# EAGLE board Opto_v2 (EAGLE 8.6.3)
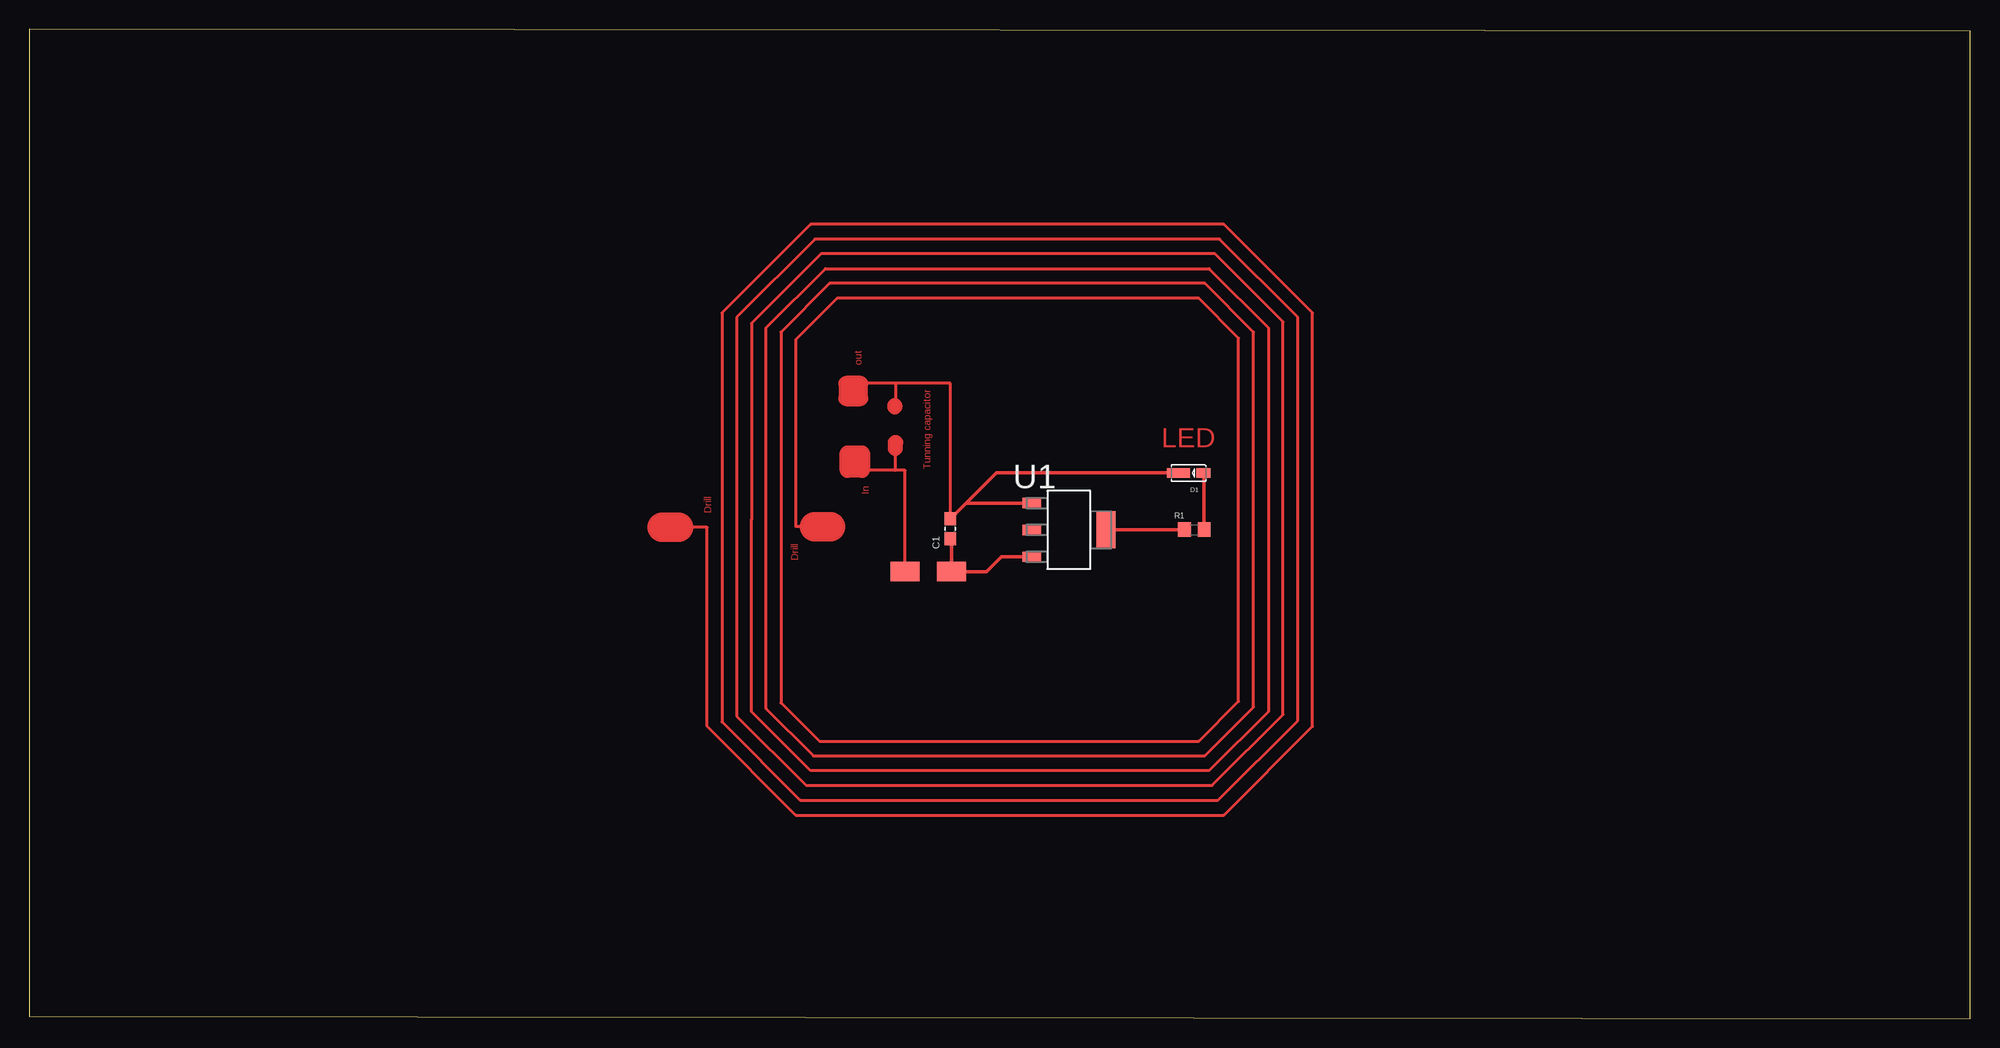
[diagram p0: board, top side]

Size 167.01 x 85.1 mm. Coordinates in mm from the lower left corner, seen from the top.
Outline: 0,0.2 167.01,0 167.01,84.9 0,85.1 0,0.2
Copper layers (1*16): Top 0.035mm / dielectric 1.5mm / Bottom 0.035mm
Design rules "default": minimum track width 6mil, minimum drill 0.35mm, track to track 6mil, track to pad 6mil, pad to pad 6mil, via to via 6mil, smd to smd 6mil, copper to edge 40mil, drill to drill 6mil, minimum pad ring 10mil, minimum via ring 8mil, stop-mask expansion 4mil, vias tented up to drill 0mil, thermal gap 10mil

## Footprints (pad centres in the part's own frame; a part is rotated, then mirrored left to right if it is on the bottom)
CAPC1608X90 = smd 1.1 x 1: 1 -0.85,0; 2 0.85,0
WL-SWTP_3014 = smd 2 x 0.8: 1 0.88,0 | smd 1.2 x 0.8: 2 -1.27,0
RESC1608X55 = smd 1.1 x 1.25: 1 -0.85,0; 2 0.85,0
SOT230P700X180-4N = smd 1.626 x 0.889: 1 -3.2,2.311; 2 -3.2,0; 3 -3.2,-2.311 | smd 1.626 x 3.175: 4 3.2,0
SMA-DIODE = smd 2.5 x 1.7: 1 -1.992,0.015; 2 2.008,0.015

## Placement (x,y rotation side)
C1  06036D225KAT2A  [CAPC1608X90]  79.25,42.12 90 top
D1  WL-SWTP3014  [WL-SWTP_3014]  99.76,46.92 180 top
R1  CRCW06033K30FKEA  [RESC1608X55]  100.23,42.04 0 top
U1  TLV1117-18IDCYG3  [SOT230P700X180-4N]  89.45,42.02 0 top
U$1  B220A-13-F  [SMA-DIODE]  77.36,38.42 0 top

## Library data of the parts
C1 = Capacitor_2.2uF_0603; DESCRIPTION: 0603 2.2 uF 6.3 V ±10 % Tolerance X5R Surface Mount Multilayer Ceramic Capacitor; DIGI-KEY_PART_NUMBER: 478-1252-1-ND; DIGI-KEY_PURCHASE_URL: https://www.digikey.co.uk/product-detail/en/avx-corporation/06036D225KAT2A/478-1252-1-ND/564284?utm_source=snapeda&utm_medium=aggregator&utm_campaign=symbol; MF: AVX; MP: 06036D225KAT2A; PACKAGE: 0603 AVX
D1 = WL-SWTP; DESCRIPTION: SMD LED PLCC2 Daylight white 120 ° 3.2 V Wuerth Elektronik; DIGI-KEY_PART_NUMBER: 732-5661-1-ND; DIGI-KEY_PURCHASE_URL: https://www.digikey.co.uk/product-detail/en/wurth-electronics-inc/158301250/732-5661-1-ND/4947879?utm_source=snapeda&utm_medium=aggregator&utm_campaign=symbol; MF: Wurth Electronics; MP: 158301250; PACKAGE: 1206 Würth Elektronik
R1 = CRCW06033K30FKEA; DESCRIPTION: Res Thick Film 0603 3.3K Ohm 1% 0.1W_1/10W_ ?100ppm/C SMD Automotive Paper T/R; DIGI-KEY_PART_NUMBER: 541-3.30KHCT-ND; DIGI-KEY_PURCHASE_URL: https://www.digikey.com/product-detail/en/vishay-dale/CRCW06033K30FKEA/541-3.30KHCT-ND/1179866?utm_source=snapeda&utm_medium=aggregator&utm_campaign=symbol; MF: Vishay Dale; MP: CRCW06033K30FKEA; PACKAGE: 0603 Vishay
U1 = TLV1117-18IDCYG3; AVAILABILITY: Unavailable; DESCRIPTION: Single Output LDO, 800mA, Fixed and Adj., Internal Current limit, Thermal Overload Protection 4-SOT-223 -40 to 125; MF: Texas Instruments; MP: TLV1117-18IDCYG3; PACKAGE: SOT-223 Texas Instruments; PRICE: None
U$1 = Schottky_0603; DESCRIPTION: B220A Series 20 V 2 A Surface Mount Schottky Barrier Rectifier - SMA; DIGI-KEY_PART_NUMBER: B220A-FDICT-ND; DIGI-KEY_PURCHASE_URL: https://www.digikey.co.uk/product-detail/en/diodes-incorporated/B220A-13-F/B220A-FDICT-ND/751528?utm_source=snapeda&utm_medium=aggregator&utm_campaign=symbol; MF: Diodes Inc.; MP: B220A-13-F; PACKAGE: DO-214 Diodes Inc.

## Nets
GND: C1.2 D1.1 U1.1
IN+: U$1.1
N$1: R1.1 U1.4
N$2: D1.2 R1.2
N$4: C1.1 U1.3 U$1.2

## Tracks (layer width: path | path; a pad name or v marks a point on that pad's centre or on a via)
GND
  Top 0.254: C1.2 79.25,54.62 74.52,54.62 | 74.52,54.62 71.53,54.62 | 74.52,54.62 74.52,52.72 74.48,52.72
  Top 0.305: D1.1 83.2,46.92 80.63,44.35 | 80.63,44.35 C1.2 | U1.1 80.64,44.34 80.63,44.35
  Top 1.27: 74.48,52.72 74.48,52.61 | 71.53,54.62 70.28,54.62 70.28,53.31 71.53,53.31 71.53,54.62
IN
  Top 0.254: 62.15,42.9 62.15,26.39 67.23,21.32 101.52,21.32 106.6,26.39 106.6,59.41 101.52,64.49 68.5,64.49 63.42,59.41 63.42,26.65 67.48,22.59 101.14,22.59 105.33,26.78 105.33,59.03 101.14,63.22 68.88,63.22 64.69,59.03 64.69,27.16 67.99,23.86 100.63,23.86 104.06,27.28 104.06,58.53 100.63,61.95 69.52,61.95 65.96,58.4 65.96,42.31 67.59,42.31 67.75,42.31
  Top 2.54: 67.59,42.31 68.94,42.31 68.94,42.3
IN+
  Top 0.254: U$1.1 75.36,47.13 74.52,47.13 | 74.52,47.13 71.65,47.13 71.5,47.13 | 74.52,47.13 74.52,49.02 74.54,49.02 | 70.38,47.83 70.38,47.13
  Top 1.27: 74.52,49.02 74.52,49.55 74.54,49.55 | 71.17,47.83 70.38,47.83 | 71.65,47.13 70.38,47.13 70.38,48.64 71.7,48.64 71.7,47.13 71.65,47.13
N$1
  Top 0.305: R1.1 92.68,42.04 U1.4
N$2
  Top 0.305: R1.2 101.09,46.86 D1.2
N$4
  Top 0.305: C1.1 79.36,41.17 U$1.2 82.37,38.44 83.64,39.71 U1.3
OUT
  Top 0.254: 62.15,42.9 62.15,59.8 68.12,65.77 102.03,65.77 107.87,59.92 107.87,26.14 101.77,20.05 66.85,20.05 60.88,26.01 60.88,60.3 67.61,67.03 102.41,67.03 109.14,60.3 109.14,25.63 102.28,18.78 66.34,18.78 59.61,25.51 59.61,60.68 67.23,68.3 102.79,68.3 110.41,60.68 110.41,25.12 102.79,17.5 65.96,17.5 58.34,25.12 58.34,42.25 55.86,42.25
  Top 2.54: 55.86,42.25 54.45,42.25

## Text on the board
Top: out | LED | Tunning capacitor | In | Drill | Drill